# Altium PCB EEG_PCB.PcbDoc (part 2 of 2)
Units mm, origin at the board's own origin, x right, y up, seen from the top; angles counter-clockwise.
Board outline 100 x 50 mm, 4 copper layers (Top Layer, GND Layer, Power Layer, Bottom Layer), stack 0.568 mm thick; 118 components, 80 nets, 412 pads, 345 vias.
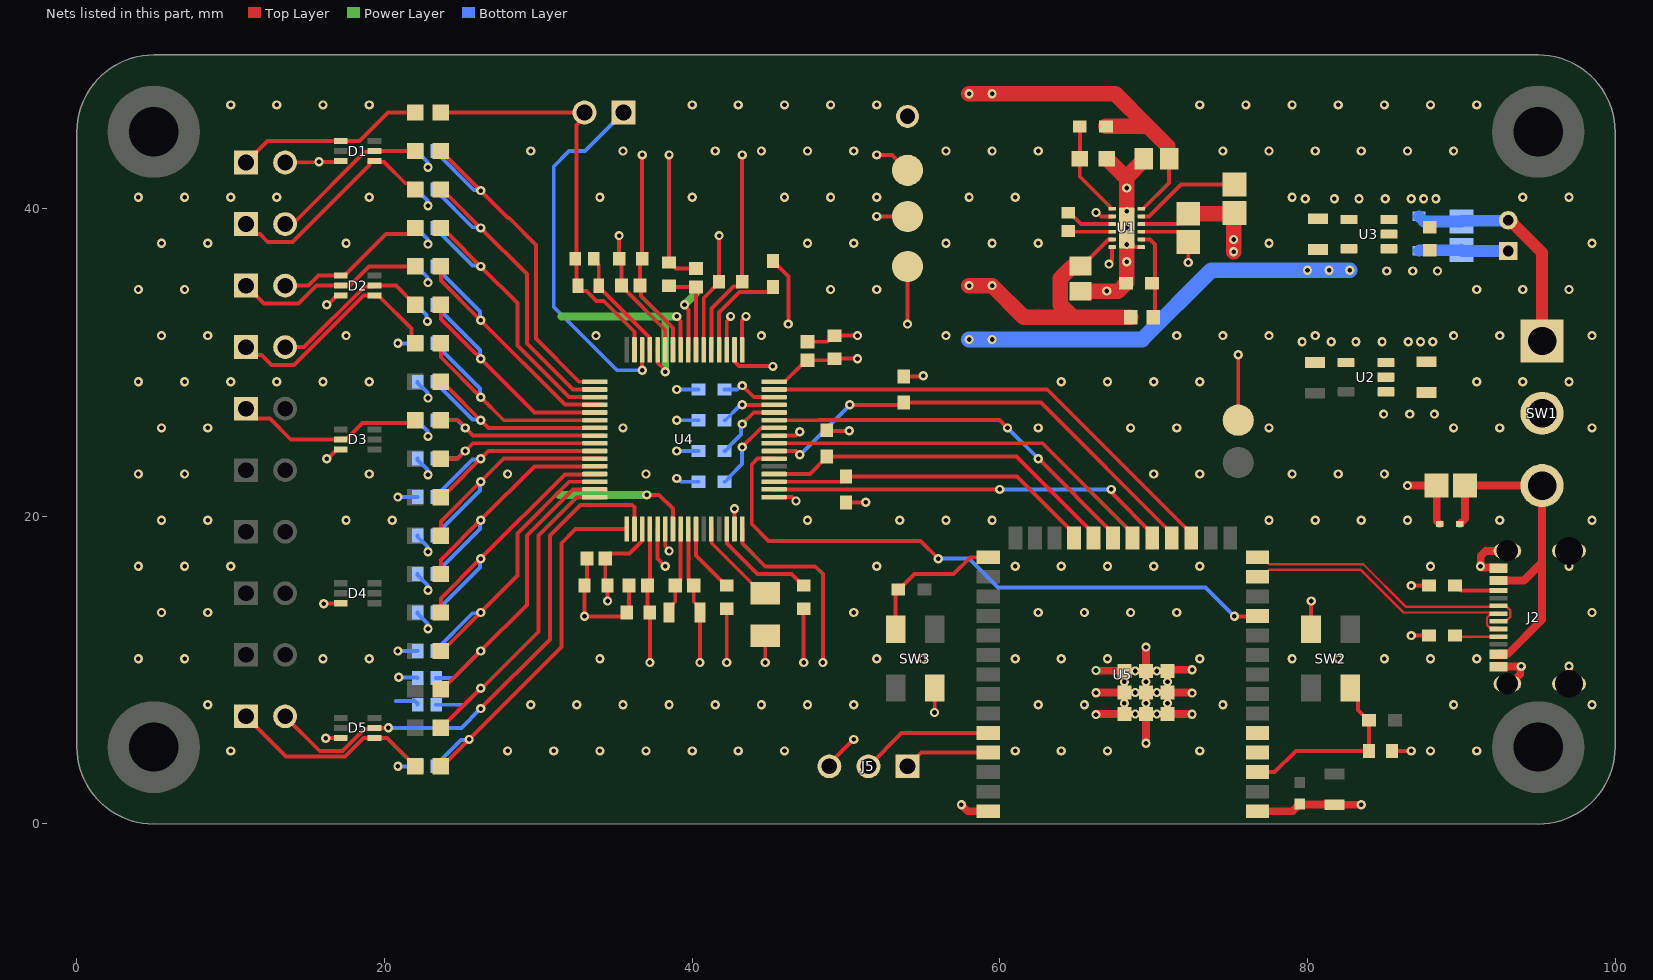
[diagram p4: the nets of this part, all layers, seen from the top]

## Via types
v1: diameter 0.6, hole 0.3, Top Layer to Bottom Layer, tented both sides, 345 vias

## Nets (pads, with @x,y where several pads share a name; then routed paths per layer and width w, separated by ;. In a path a pad name is that pad's centre, name@x,y a point inside that pad or via, vN(x,y) a via of type N, cw(c..) or ccw(c..) an arc to the next point about the centre after c; other vN are vias at no path point) (continued)
5P: D3.2 J3E.1 R18.1 | length 12.3
  Top Layer w0.254: J3E.1@11,27 11.648,26.352 12.553,26.352 13.905,25 D3.2@17.15,25 17.223,25.073 17.573,25.073 18.577,26.077 21.827,26.077 R18.1@22,26.25
6N: D2.5 J3D.2 R15.1 | length 10.6
  Top Layer w0.254: J3D.2@13.54,31 14.771,31 18.698,34.927 19.277,34.927 D2.5@19.35,35 20.749,35 R15.1@22,33.75
6P: D2.4 J3D.1 R16.1 | length 15
  Top Layer w0.254: J3D.1@11,31 11.507,30.493 12.007,30.493 12.656,29.844 14.116,29.844 18.622,34.35 D2.4@19.35,34.35 19.423,34.277 19.673,34.277 21.75,32.2 21.75,31.5 R16.1@22,31.25
7N: D2.1 J3C.2 R13.1 | length 10
  Top Layer w0.254: J3C.2@13.54,35 15.07,35 15.72,35.65 D2.1@17.15,35.65 17.4,35.65 17.473,35.723 20.096,38.346 21.596,38.346 R13.1@22,38.75
7P: D2.2 J3C.1 R14.1 | length 12.5
  Top Layer w0.254: J3C.1@11,35 12.156,33.844 14.415,33.844 15.571,35 D2.2@17.15,35 17.201,35.051 17.78,35.051 18.979,36.25 R14.1@22,36.25
8N: D1.5 J3B.2 R11.1 | length 10.4
  Top Layer w0.254: J3B.2@13.54,39 13.788,39.248 14.269,39.248 18.698,43.677 19.277,43.677 D1.5@19.35,43.75 R11.1@22,43.75
8P: D1.4 J3B.1 R12.1 | length 14.5
  Top Layer w0.254: J3B.1@11,39 11.648,38.352 11.898,38.352 12.406,37.844 14.019,37.844 19.027,42.852 19.027,43.027 19.1,43.1 D1.4@19.35,43.1 19.415,43.035 19.965,43.035 21.346,41.654 21.596,41.654 R12.1@22,41.25
ADS_GPIO1: R32.1 U4.42 | length 5.3
  Top Layer w0.254: v1(43.25,24.5) 44.477,25.727 45.302,25.727 U4.42@45.325,25.75
  Bottom Layer w0.254: R32.1@42.1,22.25 42.15,22.25 42.423,22.523 42.423,22.573 43.25,23.4 v1(43.25,24.5)
ADS_GPIO2: R33.1 U4.44 | length 4.6
  Top Layer w0.254: v1(43.25,26) 44,26.75 U4.44@45.325,26.75
  Bottom Layer w0.254: R33.1@42.1,24.25 42.15,24.25 42.423,24.523 42.423,24.573 43.184,25.334 43.184,25.934 v1(43.25,26)
ADS_GPIO3: R34.1 U4.45 | length 3.6
  Top Layer w0.254: v1(43.25,27.25) U4.45@45.325,27.25
  Bottom Layer w0.254: R34.1@42.1,26.25 42.15,26.25 43.084,27.184 43.184,27.184 v1(43.25,27.25)
ADS_GPIO4: R35.1 U4.46 | length 3.6
  Top Layer w0.254: v1(43.25,28.5) 44,27.75 U4.46@45.325,27.75
  Bottom Layer w0.254: R35.1@42.1,28.25 42.931,28.25 43.181,28.5 v1(43.25,28.5)
ADS_RESET: R30.1 U4.36 U5.22 | length 23.7
  Top Layer w0.254: U4.36@45.325,22.75 47.65,22.75 48.75,23.85 R30.1@48.75,23.9 61.085,23.9 66.095,18.89 U5.22@66.095,18.59
ADS_START: U4.38 U5.11 | length 40.9
  Top Layer w0.254: U4.38@45.325,23.75 44.25,23.75 43.873,23.373 43.873,19.49 44.96,18.403 54.847,18.403 v1(56,17.25) ; v1(75.25,13.5) 76.72,13.5 U5.11@76.75,13.53
  Bottom Layer w0.254: v1(56,17.25) 58,17.25 59.875,15.375 73.375,15.375 v1(75.25,13.5)
AVDD: C4.1 C39.1 C40.1 C41.2 C44.1 C45.2 R1.1 TP2.1 U1.11 U4.19 U4.21 U4.22 U4.54 U4.56 U4.59 | length 51.8
  Top Layer w0.254: C41.2@34.35,17.25 34.35,15.65 C40.1@34.5,15.5 v1(34.5,14.5) ; C41.2@34.35,17.275 34.648,17.573 35.915,17.573 36.727,18.385 36.727,19.152 U4.19@36.75,19.175 ; v1(35.25,38.25) C44.1@35.25,36.75 35.4,36.6 C45.2@35.4,35 ; C45.2@35.4,34.975 38.25,32.125 U4.59@38.25,30.825 ; U4.21@37.75,19.175 37.75,17.25 v1(38.25,16.75) ; U4.22@38.25,19.175 38.25,18.059 38.5,17.809 v1(38.5,17.75) ; v1(39.5,33.75) 39.5,33.656 39.75,33.406 U4.56@39.75,30.825 ; U4.54@40.75,30.825 40.75,34.2 41.75,35.2 C39.1@41.75,35.25 v1(41.75,38.25) ; v1(52,39.5) TP2.1@54,39.5 ; C4.1@65.25,36.276 65.351,36.276 67.073,37.998 67.298,37.998 U1.11@67.3,38
  Top Layer w1.016: v1(58,35) v1(59.5,35) 61.55,32.95 64.757,32.95 ; C4.1@65.25,36.276 65.155,36.181 64.641,36.181 63.938,35.478 63.938,33.769 64.757,32.95 ; R1.1@68.521,32.95 64.757,32.95
  Power Layer w0.508: v1(39.5,33.75) 40.25,34.5
AVSS: C5.2 C32.1 C33.2 C34.1 C35.2 C36.2 C37.1 C38.2 C39.2 C42.2 C43.1 C44.2 C45.1 R3.2 TP3.1 U1.6 U4.20 U4.23 U4.25 U4.32 U4.53 U4.57 U4.58 U4.60 | length 124.1
  Top Layer w0.254: v1(36.75,43.5) C44.2@36.75,36.75 36.6,36.6 C45.1@36.6,35 36.682,34.918 36.682,34.318 38.75,32.25 U4.58@38.75,30.825 ; v1(37.046,21.394) 37.856,21.394 38.75,20.5 U4.23@38.75,19.175 ; v1(37.25,10.5) C43.1@37.25,13.75 37.1,13.9 C42.2@37.1,15.5 37.25,15.65 U4.20@37.25,19.175 ; U4.60@37.75,30.825 37.773,30.802 37.773,29.977 38.184,29.566 38.184,29.466 v1(38.25,29.4) ; C36.2@38.5,36.5 v1(38.5,43.5) ; C36.2@38.55,36.5 38.95,36.1 C37.1@40.25,36.1 ; v1(39,33) 39,32.933 39.25,32.683 U4.57@39.25,30.825 ; U4.25@39.75,19.175 39.75,15.875 40.1,15.525 C32.1@40.1,15.5 40.1,14.45 40.5,14.05 C33.2@40.5,13.75 v1(40.5,10.5) ; U4.53@41.25,30.825 41.25,33.5 42.685,34.935 42.977,34.935 43.25,35.208 C39.2@43.25,35.25 v1(43.25,43.5) ; v1(42.25,10.5) C38.2@42.25,14 ; U4.32@43.25,19.175 43.273,19.152 43.273,18.227 44.75,16.75 48,16.75 48.5,16.25 v1(48.5,10.5) ; v1(44.75,10.5) C34.1@44.75,12.249 ; v1(47.25,10.5) C35.2@47.25,14 ; v1(52,43.5) 53,43.5 TP3.1@54,42.5 ; U1.6@69.2,40 69.321,40 71.002,41.681 C5.2@71.002,43.25
  Top Layer w1.016: v1(58,47.478) v1(59.5,47.478) 67.5,47.478 69.628,45.35 ; R3.2@66.9,45.35 69.628,45.35 ; C5.2@71.002,43.25 70.908,43.345 70.908,44.07 69.628,45.35
  Power Layer w0.254: 31.25,21.5 31.356,21.394
  Power Layer w0.508: 31.356,21.394 v1(37.046,21.394) ; 31.5,33 38.25,33 ; v1(38.25,29.4) 38.25,33 ; v1(39,33) 38.25,33
BIAS: D1.1 J3A.1 R10.1 | length 12.3
  Top Layer w0.254: J3A.1@11,43 12.4,44.4 D1.1@17.15,44.4 18.379,44.4 20.229,46.25 R10.1@22,46.25
BIAS_IN: JP1.1 U4.62 | length 23.9
  Top Layer w0.254: v1(36.75,29.5) U4.62@36.75,30.825
  Bottom Layer w0.254: JP1.1@35.54,46.25 33.04,43.75 32,43.75 31,42.75 31,33.613 35.113,29.5 v1(36.75,29.5)
BIAS_INV: C14.1 R9.1 U4.61 | length 7.3
  Top Layer w0.254: C14.1@33.6,36.75 33.6,36.675 33.925,36.35 R9.1@33.925,35 ; R9.1@33.925,34.875 34.148,34.652 34.19,34.652 37.227,31.615 37.227,30.848 U4.61@37.25,30.825
BIAS_OUT: C14.2 JP1.2 R9.2 R10.2 U4.63 | length 26.9
  Top Layer w0.254: R10.2@23.659,46.25 JP1.2@33,46.25 33,45.966 32.488,45.453 32.488,35.087 R9.2@32.575,35 ; R9.2@32.575,34.875 32.798,34.652 33.127,34.652 33.779,34 34.25,34 36.25,32 U4.63@36.25,30.825
CLKSEL: R29.1 U4.52 | length 6.6
  Top Layer w0.254: U4.52@41.75,30.825 41.75,33.25 43.073,34.573 43.744,34.573 43.748,34.577 44.977,34.577 45.25,34.85 R29.1@45.25,34.9
CS: R28.1 U4.39 U5.18 | length 31.2
  Top Layer w0.254: U4.39@45.325,24.25 46.75,24.25 v1(47,24) ; v1(50.25,27.25) 53.6,27.25 R28.1@53.75,27.4 62.665,27.4 71.175,18.89 U5.18@71.175,18.59
  Bottom Layer w0.254: v1(47,24) v1(50.25,27.25)
DRDY: U4.47 U5.17 | length 31.3
  Top Layer w0.254: U4.47@45.325,28.25 63.085,28.25 72.445,18.89 U5.17@72.445,18.59
DVDD: C9.1 C46.1 C47.2 R28.2 R29.2 R30.2 R31.2 TP4.1 U3.5 U4.48 U4.50 | length 48.4
  Top Layer w0.254: U4.50@42.75,30.825 42.773,30.802 42.773,30.035 43.035,29.773 45.227,29.773 v1(45.25,29.75) ; R29.2@45.25,36.6 46.25,35.6 v1(46.25,32.5) ; U4.48@45.325,28.75 46,28.75 47.102,29.852 47.202,29.852 C47.2@47.5,30.15 49.15,30.15 C46.1@49.25,30.25 v1(50.75,30.25) ; R30.2@48.75,25.6 48.791,25.559 v1(50.211,25.559) ; R31.2@50,20.9 50.013,20.913 v1(51.288,20.913) ; R28.2@53.75,29.1 54.988,29.1 v1(55.026,29.138) ; v1(54,32.5) TP4.1@54,36.25
  Bottom Layer w1.016: v1(58,31.5) v1(59.5,31.5) 69.25,31.5 73.75,36 v1(80,36) 80.006,35.994 v1(81.405,35.994) 81.411,36 v1(82.75,36)
EN: C11.1 R7.2 SW2.1_1- U5.3 | length 12.5
  Top Layer w0.254: U5.3@76.75,3.37 77.87,3.37 79.25,4.75 C11.1@84,4.75 R7.2@84,6.75 83.95,6.75 83.278,7.422 83.278,8.337 SW2.1_1-@82.77,8.845
GND: C2.2 C3.2 C4.2 C5.1 C6.2 C7.2 C9.2 C10.2 C11.2 C12.2 C13.2 C15.2 C16.2 C17.2 C18.2 C19.2 C20.2 C21.2 C22.2 C23.2 C24.2 C25.2 C26.2 C27.2 C28.2 C29.2 C30.2 C31.2 C40.2 C41.1 C42.1 C43.2 C46.2 C47.1 C48.2 C49.2 D1.3 D2.3 D3.3 D4.3 D5.3 D6.2 D7.2 J1.1 J2.1 J2.2 J2.3 J2.4 J2.A1-B12 J2.B1-A12 J3A.2 J5.3 R2.2 R4.1 R5.2 R6.2 R32.2 R33.2 R34.2 R35.2 SW2.2_2+ SW3.2_2+ TP1.1 U1.1 U1.4 U1.13 U2.2 U2.4 U3.2 U3.4 U4.31 U4.33 U4.41 U4.49 U4.51 U5.1 U5.40 U5.41_1 U5.41_2 U5.41_3 U5.41_4 U5.41_5 U5.41_6 U5.41_7 U5.41_8 U5.41_9 U5.41_10 U5.41_11 U5.41_12 U5.41_13 U5.41_14 U5.41_15 U5.41_16 U5.41_17 U5.41_18 U5.41_19 U5.41_20 U5.41_21 | length 138.8
  Top Layer w0.254: J3A.2@13.54,43 13.563,43.023 15.719,43.023 v1(15.742,43.046) 16.827,43.046 16.881,43.1 D1.3@17.15,43.1 ; v1(16.046,14.318) 16.062,14.334 17.134,14.334 D4.3@17.15,14.35 ; v1(16.179,5.578) 16.19,5.589 17.139,5.589 D5.3@17.15,5.6 ; v1(16.239,23.738) 16.288,23.738 16.9,24.35 D3.3@17.15,24.35 ; v1(16.25,33.75) 16.3,33.75 16.9,34.35 D2.3@17.15,34.35 ; C41.1@33.15,17.25 33.15,15.65 C40.2@33,15.5 v1(33,13.5) 35.5,13.5 C43.2@35.75,13.75 35.9,13.9 C42.1@35.9,15.5 ; U4.51@42.25,30.825 42.25,32.683 42.5,32.933 v1(42.5,33) ; U4.31@42.75,19.175 v1(42.75,20.5) ; U4.49@43.25,30.825 43.25,32.75 v1(43.5,33) ; U4.33@45.325,21.25 46.5,21.25 v1(46.75,21) ; U4.41@45.325,25.25 46.75,25.25 v1(47,25.5) ; C47.1@47.5,31.35 48.8,31.35 49.2,31.75 C46.2@49.25,31.75 v1(50.75,31.75) ; J5.3@48.92,3.75 48.92,3.92 v1(50.5,5.5) ; v1(55.75,7.25) 55.77,7.27 SW3.2_2+@55.77,8.845 ; U5.41_12@68.1,7.85 U5.41_3@68.1,8.55 U5.41_15@68.1,9.25 ; v1(68.25,37.675) 68.5,37.675 68.673,37.502 69.198,37.502 U1.1@69.2,37.5 ; U5.41_17@68.8,7.15 U5.41_8@69.5,7.15 U5.41_16@70.2,7.15 ; U5.41_19@68.8,8.55 U5.41_1@69.5,8.55 ; U5.41_21@68.8,9.95 U5.41_5@69.5,9.95 U5.41_20@70.2,9.95 ; U1.4@69.2,39 71.573,39 C2.2@72.25,39.675 C2.2@72.25,39.675 ; U5.41_14@69.5,9.25 U5.41_1@69.5,8.55 ; U5.41_18@70.2,8.55 U5.41_1@69.5,8.55 ; U5.41_11@70.9,7.85 U5.41_2@70.9,8.55 U5.41_13@70.9,9.25 ; SW2.2_2+@80.23,12.655 80.23,14.48 v1(80.25,14.5) ; C11.2@85.5,4.75 v1(86.75,4.75) ; v1(86.75,12.25) R5.2@87.9,12.25 ; v1(86.75,15.5) R6.2@87.9,15.5
  Top Layer w0.508: v1(57.5,1.25) 57.92,0.83 U5.40@59.25,0.83 ; v1@66.243,9.98 66.258,9.965 68.085,9.965 U5.41_6@68.1,9.95 ; v1@66.27,8.532 66.279,8.541 68.091,8.541 U5.41_3@68.1,8.55 ; v1@66.276,7.11 66.301,7.11 66.341,7.15 U5.41_9@68.1,7.15 ; v1(69.5,5.25) U5.41_8@69.5,7.15 ; U5.41_10@69.5,7.85 U5.41_1@69.5,8.55 ; U5.41_5@69.5,9.95 v1(69.5,11.5) ; U5.41_7@70.9,7.15 70.906,7.144 72.493,7.144 v1(72.5,7.137) ; U5.41_2@70.9,8.55 72.466,8.55 72.505,8.512 v1@72.53,8.512 ; U5.41_4@70.9,9.95 70.978,10.028 v1(72.5,10.028) v1@72.552,10.028 ; U5.1@76.75,0.83 79.03,0.83 C13.2@79.5,1.3 79.525,1.275 81.725,1.275 C12.2@81.75,1.25 v1(83.5,1.25) ; v1(86.5,22) C48.2@88.399,22 88.399,19.691 D7.2@88.59,19.5 ; J2.A1-B12@92.425,10.23 92.433,10.238 v1@93.886,10.238 ; J2.B1-A12@92.425,16.63 92.379,16.676 91.349,16.676 91.292,16.732 91.268,16.732 v1(91.25,16.75) 91.268,16.768 91.268,17.428 91.59,17.75 J2.2@93,17.75 ; J2.1@93,9.11 93.198,9.11 93.828,9.74 93.828,10.18 v1@93.886,10.238 ; v1(93.894,10.246) v1@93.886,10.238 ; J2.3@97,9.11 v1(97,10.25) ; v1(97,16.75) 97,17.523 97.227,17.75 J2.4@97.25,17.75
  Top Layer w1.016: C4.2@65.25,34.624 66.95,34.624 67.674,34.624 R2.2@68.2,35.15 68.25,35.2 v1(68.25,36.55) v1(68.25,37.675) ; R4.1@66.95,43.25 66.969,43.25 68.25,41.969 ; v1(68.25,39.825) v1(68.25,41.35) 68.25,41.969 ; C5.1@69.35,43.25 69.35,43.149 68.25,42.049 68.25,41.969 ; C2.2@72.25,39.675 C3.2@75.201,39.675 ; v1(75.2,37.2) v1(75.2,38) C3.2@75.2,39.675 ; C3.2@75.275,39.75 C3.2@75.25,39.725 C3.2@75.201,39.675
  Bottom Layer w0.254: 20.75,8 21.902,8 21.902,8.073 22.15,7.825 C15.2@22.15,7.75 ; v1(20.868,3.75) C31.2@22.15,3.75 ; v1(20.868,11.25) C29.2@22.15,11.25 ; v1(20.868,21.25) C25.2@22.15,21.25 ; v1(20.868,31.25) C21.2@22.15,31.25 ; v1(20.925,9.535) 22.115,9.535 C30.2@22.15,9.5 ; C28.2@22.15,13.75 22.15,13.675 22.782,13.043 22.782,12.745 v1(22.829,12.698) ; C27.2@22.15,16.25 22.15,16.175 22.782,15.543 22.782,15.245 v1(22.829,15.198) ; C26.2@22.15,18.75 22.15,18.675 22.782,18.043 22.782,17.745 v1(22.829,17.698) ; C24.2@22.15,23.75 22.15,23.675 22.782,23.043 22.782,22.745 v1(22.829,22.698) ; C23.2@22.15,26.25 22.15,26.175 22.782,25.543 22.782,25.245 v1(22.829,25.198) ; C22.2@22.15,28.75 22.15,28.675 22.782,28.043 22.782,27.745 v1(22.829,27.698) ; C20.2@22.15,33.75 22.15,33.675 22.738,33.087 22.738,32.722 v1(22.785,32.675) ; C19.2@22.15,36.25 22.15,36.175 22.782,35.543 22.782,35.245 v1(22.829,35.198) ; C18.2@22.15,38.75 22.15,38.675 22.782,38.043 22.782,37.745 v1(22.829,37.698) ; C17.2@22.15,41.25 22.15,41.175 22.782,40.543 22.782,40.245 v1(22.829,40.198) ; C16.2@22.15,43.75 22.15,43.675 22.782,43.043 22.782,42.745 v1(22.829,42.698) ; v1(39,22.466) 39.067,22.466 39.283,22.25 R32.2@40.4,22.25 ; v1(39,24.25) R33.2@40.4,24.25 ; v1(39,26.25) R34.2@40.4,26.25 ; v1(39,28.25) R35.2@40.4,28.25
  Bottom Layer w0.762: D6.2@87.25,37.27 87.277,37.297 89.973,37.297 C49.2@90,37.325 ; C49.2@90.075,37.25 J1.1@93.05,37.25
  other v1: 10,4.75 28,4.75 31,4.75 34,4.75 37,4.75 40,4.75 43,4.75 46,4.75 61,4.75 64,4.75 67,4.75 73,4.75 88,4.75 91,4.75 66.25,7.11 8.5,7.75 29.5,7.75 32.5,7.75 35.5,7.75 38.5,7.75 41.5,7.75 44.5,7.75 47.5,7.75 50.5,7.75 62.5,7.75 65.5,7.75 74.5,7.75 89.5,7.75 98.5,7.75 72.5,8.512 66.25,8.532 66.25,9.98 4,10.75 7,10.75 16,10.75 19,10.75 34,10.75 52,10.75 55,10.75 61,10.75 64,10.75 67,10.75 73,10.75 79,10.75 82,10.75 85,10.75 88,10.75 91,10.75 5.5,13.75 8.5,13.75 50.5,13.75 62.5,13.75 65.5,13.75 68.5,13.75 71.5,13.75 98.5,13.75 4,16.75 7,16.75 10,16.75 52,16.75 61,16.75 64,16.75 67,16.75 70,16.75 73,16.75 88,16.75 5.5,19.75 8.5,19.75 17.5,19.75 20.5,19.75 47.5,19.75 53.5,19.75 56.5,19.75 59.5,19.75 77.5,19.75 80.5,19.75 83.5,19.75 86.5,19.75 92.5,19.75 98.5,19.75 4,22.75 7,22.75 19,22.75 28,22.75 37,22.75 70,22.75 73,22.75 79,22.75 82,22.75 85,22.75 5.5,25.75 8.5,25.75 35.5,25.75 62.5,25.75 68.5,25.75 71.5,25.75 77.5,25.75 89.5,25.75 92.5,25.75 98.5,25.75 4,28.75 7,28.75 10,28.75 13,28.75 16,28.75 19,28.75 64,28.75 67,28.75 70,28.75 73,28.75 91,28.75 94,28.75 97,28.75 79.65,31.35 81.55,31.35 83.15,31.35 86.55,31.35 87.35,31.35 88.15,31.35 5.5,31.75 8.5,31.75 17.5,31.75 33.75,31.75 44.5,31.75 56.5,31.75 71.5,31.75 74.5,31.75 77.5,31.75 80.5,31.75 89.5,31.75 92.5,31.75 98.5,31.75 66.95,34.65 4,34.75 7,34.75 49,34.75 52,34.75 91,34.75 94,34.75 97,34.75 5.5,37.75 8.5,37.75 17.5,37.75 47.5,37.75 50.5,37.75 56.5,37.75 59.5,37.75 62.5,37.75 77.5,37.75 98.5,37.75 68.25,38.75 79.85,40.65 81.75,40.65 83.35,40.65 86.75,40.65 87.55,40.65 88.35,40.65 4,40.75 7,40.75 10,40.75 13,40.75 19,40.75 34,40.75 40,40.75 46,40.75 49,40.75 52,40.75 58,40.75 61,40.75 79,40.75 94,40.75 97,40.75 29.5,43.75 35.5,43.75 41.5,43.75 44.5,43.75 47.5,43.75 50.5,43.75 56.5,43.75 59.5,43.75 62.5,43.75 74.5,43.75 77.5,43.75 80.5,43.75 83.5,43.75 86.5,43.75 89.5,43.75 10,46.75 13,46.75 16,46.75 19,46.75 40,46.75 43,46.75 46,46.75 49,46.75 52,46.75 73,46.75 76,46.75 79,46.75 82,46.75 85,46.75 88,46.75 91,46.75
GPIO0: R8.2 SW3.1_1- U5.27 | length 9.4
  Top Layer w0.254: SW3.1_1-@53.23,12.655 53.23,15.104 53.376,15.25 R8.2@53.4,15.25 53.45,15.25 54.45,16.25 57,16.25 58.09,17.34 U5.27@59.25,17.34
GPIO4: U5.4
GPIO5: U5.5
IN1N: C30.1 R25.2 U4.15 | length 22.2
  Top Layer w0.254: R25.2@23.659,8.75 24.064,9.155 24.155,9.155 v1(26.25,11.25) 29.25,14.25 29.25,18.75 32.25,21.75 U4.15@34.175,21.75
  Bottom Layer w0.254: C30.1@23.35,9.5 24.5,9.5 v1(26.25,11.25)
IN1P: C15.1 R26.2 U4.16 | length 23.7
  Top Layer w0.254: R26.2@23.658,6.25 26.227,8.818 26.318,8.818 30,12.5 30,18.75 32.477,21.227 34.152,21.227 U4.16@34.175,21.25
  Bottom Layer w0.254: C15.1@23.35,7.75 25.188,7.75 v1(26.256,8.818)
IN2N: C28.1 R23.2 U4.13 | length 19.5
  Top Layer w0.254: R23.2@23.659,13.75 23.659,14.659 v1(26.25,17.25) 31.727,22.727 34.152,22.727 U4.13@34.175,22.75
  Bottom Layer w0.254: C28.1@23.35,13.75 23.35,13.825 26.203,16.678 26.203,17.203 v1(26.25,17.25)
IN2P: C29.1 R24.2 U4.14 | length 20.7
  Top Layer w0.254: R24.2@23.659,11.25 24.064,11.655 24.155,11.655 v1(26.25,13.75) 28.642,16.142 28.642,18.892 32,22.25 U4.14@34.175,22.25
  Bottom Layer w0.254: C29.1@23.35,11.25 23.35,11.325 25.728,13.703 26.203,13.703 v1(26.25,13.75)
IN3N: C26.1 R21.2 U4.11 | length 17.8
  Top Layer w0.254: R21.2@23.659,18.75 23.659,19.659 v1(26.25,22.25) 27.75,23.75 U4.11@34.175,23.75
  Bottom Layer w0.254: C26.1@23.35,18.75 23.35,18.825 26.203,21.678 26.203,22.203 v1(26.25,22.25)
IN3P: C27.1 R22.2 U4.12 | length 18.6
  Top Layer w0.254: R22.2@23.659,16.25 23.659,17.159 v1(26.25,19.75) 29.75,23.25 U4.12@34.175,23.25
  Bottom Layer w0.254: C27.1@23.35,16.25 23.35,16.325 26.203,19.178 26.203,19.703 v1(26.25,19.75)
IN4N: C24.1 R19.2 U4.9 | length 13
  Top Layer w0.254: R19.2@23.659,23.75 24.75,23.75 25.75,24.75 U4.9@34.175,24.75
  Bottom Layer w0.254: C24.1@23.35,23.75 24.75,23.75 v1(25.25,24.25)
IN4P: C25.1 R20.2 U4.10 | length 15.7
  Top Layer w0.254: R20.2@23.659,21.25 24.064,21.655 24.155,21.655 v1(26.25,23.75) 26.75,24.25 U4.10@34.175,24.25
  Bottom Layer w0.254: C25.1@23.35,21.25 23.35,21.325 25.728,23.703 26.203,23.703 v1(26.25,23.75)
IN5N: C22.1 R17.2 U4.7 | length 15.7
  Top Layer w0.254: R17.2@23.659,28.75 24.064,28.345 24.155,28.345 v1(26.25,26.25) 26.75,25.75 U4.7@34.175,25.75
  Bottom Layer w0.254: C22.1@23.35,28.75 23.35,28.675 25.728,26.297 26.203,26.297 v1(26.25,26.25)
IN5P: C23.1 R18.2 U4.8 | length 13.1
  Top Layer w0.254: R18.2@23.659,26.25 24.823,26.25 25.25,25.823 v1(25.25,25.75) 25.75,25.25 U4.8@34.175,25.25
  Bottom Layer w0.254: C23.1@23.35,26.25 24.75,26.25 v1(25.25,25.75)
IN6N: C20.1 R15.2 U4.5 | length 18.6
  Top Layer w0.254: R15.2@23.659,33.75 23.659,32.841 v1(26.25,30.25) 29.75,26.75 U4.5@34.175,26.75
  Bottom Layer w0.254: C20.1@23.35,33.75 23.35,33.675 26.203,30.822 26.203,30.297 v1(26.25,30.25)
IN6P: C21.1 R16.2 U4.6 | length 17.8
  Top Layer w0.254: R16.2@23.659,31.25 23.659,30.341 v1(26.25,27.75) 27.75,26.25 U4.6@34.175,26.25
  Bottom Layer w0.254: C21.1@23.35,31.25 23.35,31.175 26.203,28.322 26.203,27.797 v1(26.25,27.75)
IN7N: C18.1 R13.2 U4.3 | length 20.7
  Top Layer w0.254: R13.2@23.659,38.75 24.064,38.345 24.155,38.345 v1(26.25,36.25) 28.642,33.858 28.642,31.108 32,27.75 U4.3@34.175,27.75
  Bottom Layer w0.254: C18.1@23.35,38.75 23.35,38.675 25.728,36.297 26.203,36.297 v1(26.25,36.25)
IN7P: C19.1 R14.2 U4.4 | length 19.5
  Top Layer w0.254: R14.2@23.659,36.25 23.659,35.341 v1(26.25,32.75) 31.727,27.273 34.152,27.273 U4.4@34.175,27.25
  Bottom Layer w0.254: C19.1@23.35,36.25 23.35,36.175 26.203,33.322 26.203,32.797 v1(26.25,32.75)
IN8N: C16.1 R11.2 U4.1 | length 24.3
  Top Layer w0.254: R11.2@23.659,43.75 26.233,41.177 v1(26.252,41.177) 28.037,39.392 28.108,39.392 29.846,37.654 29.846,31.553 32.649,28.75 U4.1@34.175,28.75
  Bottom Layer w0.254: C16.1@23.35,43.75 23.35,43.675 25.801,41.224 26.205,41.224 v1(26.252,41.177)
IN8P: C17.1 R12.2 U4.2 | length 22.5
  Top Layer w0.254: R12.2@23.659,41.25 24.064,40.845 24.155,40.845 v1(26.25,38.75) 29.25,35.75 29.25,31.25 32.25,28.25 U4.2@34.175,28.25
  Bottom Layer w0.254: C17.1@23.35,41.25 23.35,41.175 25.728,38.797 26.203,38.797 v1(26.25,38.75)
MISO: U4.43 U5.21 | length 25.4
  Top Layer w0.254: U4.43@45.325,26.25 48.229,26.25 48.256,26.277 59.973,26.277 v1(60.5,25.75) ; v1(62.5,23.75) 62.505,23.75 67.365,18.89 U5.21@67.365,18.59
  Bottom Layer w0.254: v1(60.5,25.75) v1(62.5,23.75)
MOSI: U4.34 U5.19 | length 26.2
  Top Layer w0.254: U4.34@45.325,21.75 v1(60,21.75) ; v1(67.25,21.75) 67.316,21.684 67.316,21.479 69.905,18.89 U5.19@69.905,18.59
  Bottom Layer w0.254: v1(60,21.75) v1(67.25,21.75)
NetC1_1: C1.1 U1.10 | length 2.9
  Top Layer w0.254: C1.1@64.45,38.55 64.498,38.502 67.298,38.502 U1.10@67.3,38.5
NetC1_2: C1.2 U1.9 | length 3.2
  Top Layer w0.254: C1.2@64.45,39.75 64.525,39.75 65.275,39 U1.9@67.3,39
NetC3_1: C3.1 U1.5 | length 6.4
  Top Layer w0.254: U1.5@69.2,39.5 69.699,39.5 71.774,41.575 C3.1@74.75,41.575
NetJ2_A5: J2.A5 R5.1 | length 2.9
  Top Layer w0.158: R5.1@89.6,12.25 89.67,12.18 J2.A5@92.425,12.18
NetJ2_B5: J2.B5 R6.1 | length 3
  Top Layer w0.254: R6.1@89.6,15.5 89.65,15.5 89.97,15.18 J2.B5@92.425,15.18
NetR1_2: R1.2 R2.1 U1.2 | length 5.8
  Top Layer w0.254: U1.2@69.2,38 69.765,38 70.1,37.665 70.1,35.15 70.1,33.071 R1.2@69.979,32.95
NetR3_1: R3.1 R4.2 U1.7 | length 6.3
  Top Layer w0.254: R3.1@65.2,45.35 65.2,43.253 R4.2@65.197,43.25 65.197,42.103 67.177,40.123 67.177,40.002 67.179,40 U1.7@67.3,40
PWDN: R31.1 U4.35 U5.23 | length 21.5
  Top Layer w0.254: U4.35@45.325,22.25 49.7,22.25 50,22.55 R31.1@50,22.6 61.115,22.6 64.825,18.89 U5.23@64.825,18.59
REF: D5.4 J3J.1 R27.1 | length 13.3
  Top Layer w0.254: J3J.1@11,7 13.604,4.396 17.418,4.396 18.622,5.6 20.15,5.6 R27.1@21.595,4.155 ; R27.1@21.595,4.154 R27.1@22,3.75
RXD: J5.2 U5.36 | length 8.7
  Top Layer w0.254: J5.2@51.46,3.75 53.62,5.91 U5.36@59.25,5.91
SCLK: U4.40 U5.20 | length 26
  Top Layer w0.254: U4.40@45.325,24.75 62.775,24.75 68.635,18.89 U5.20@68.635,18.59
SRB1: C31.1 R27.2 U4.17 | length 25.4
  Top Layer w0.254: R27.2@23.659,3.75 24.064,4.155 24.155,4.155 v1(25.5,5.5) 31.5,11.5 31.5,18.25 32.425,19.175 U4.17@35.75,19.175
  Bottom Layer w0.254: C31.1@23.35,3.75 23.35,3.825 24.978,5.453 25.453,5.453 v1(25.5,5.5)
SRB2: D5.5 J3J.2 U4.18 | length 35.7
  Top Layer w0.254: J3J.2@13.54,7 15.79,4.75 17.271,4.75 18.698,6.177 19.277,6.177 D5.5@19.35,6.25 v1(20.25,6.25) ; v1(26.25,7.5) 30.75,12 30.75,18.75 32.75,20.75 36.101,20.75 36.25,20.601 U4.18@36.25,19.175
  Bottom Layer w0.254: v1(20.25,6.25) 25,6.25 v1(26.25,7.5)
TXD: J5.1 U5.37 | length 5.6
  Top Layer w0.254: J5.1@54,3.75 54.89,4.64 U5.37@59.25,4.64
USB_D_N: J2.A7 J2.B7 U5.13 | length 19.4
  Top Layer w0.158: U5.13@76.75,16.07 76.75,16.432 77.412,16.432 77.504,16.524 83.476,16.524 86.25,13.75 92,13.75 92.355,13.75 J2.A7@92.425,13.68 92.355,13.68 J2.A7@92,13.68 ; J2.A7@91.973,13.68 91.973,13.653 91.929,13.609 91.871,13.609 91.671,13.409 91.671,12.939 91.859,12.751 92.354,12.751 J2.B7@92.425,12.68
USB_D_P: J2.A6 J2.B6 U5.14 | length 19.4
  Top Layer w0.158: U5.14@76.75,17.34 76.75,16.978 77.412,16.978 77.504,16.886 83.625,16.886 86.4,14.111 92.425,14.111 92.972,14.111 93.194,13.889 93.194,13.471 92.974,13.251 92.496,13.251 J2.A6@92.425,13.18
VBAT: C49.1 D6.1 J1.2 SW1.1 | length 14.8
  Top Layer w0.762: J1.2@93.05,39.25 93.148,39.25 95.25,37.148 SW1.1@95.25,31.4
  Bottom Layer w0.762: D6.1@87.25,39.5 87.575,39.175 C49.1@90,39.175 90.037,39.213 93.013,39.213 J1.2@93.05,39.25
VBUS: C48.1 D7.1 J2.A4-B9 J2.B4-A9 SW1.3 | length 23.4
  Top Layer w0.508: D7.1@89.91,19.5 90.25,19.84 C48.1@90.25,22 SW1.3@95.25,22 95.25,17 ; J2.A4-B9@92.425,11.03 92.471,11.076 93.047,11.076 95.25,13.279 95.25,17 ; J2.B4-A9@92.425,15.83 94.08,15.83 95.25,17
VCAP1: C34.2 U4.28 | length 5.8
  Top Layer w0.254: U4.28@41.25,19.175 41.273,19.152 41.273,18.252 44.525,15 C34.2@44.75,15
VCAP2: C35.1 U4.30 | length 7.1
  Top Layer w0.254: U4.30@42.25,19.175 42.273,19.152 42.273,18.227 44.25,16.25 46.45,16.25 47.2,15.5 C35.1@47.25,15.5
VCAP3: C36.1 C37.2 U4.55 | length 5.9
  Top Layer w0.254: C36.1@38.5,35 38.6,34.9 C37.2@40.25,34.9 U4.55@40.25,30.825
VCAP4: C38.1 U4.26 | length 4.5
  Top Layer w0.254: U4.26@40.25,19.175 40.25,17.45 42.2,15.5 C38.1@42.25,15.5
VIN: C2.1 C6.1 C10.1 SW1.2 TP6.1 U1.3 U1.8 U1.12 U2.1 U2.3 U3.1 U3.3 | length 11.2
  Top Layer w0.254: v1(66.25,39.75) 66.344,39.75 66.594,39.5 U1.8@67.3,39.5 ; v1(67.1,36.4) 67.1,36.467 67.3,36.667 U1.12@67.3,37.5 ; U1.3@69.2,38.5 71.573,38.5 C2.1@72.25,37.825 C2.1@72.25,37.825 v1(72.25,36.5) ; TP6.1@75.5,26.25 v1(75.5,30.5)
  other v1: 84.95,26.65 86.65,26.65 88.25,26.65 84.85,31.35 85.15,35.95 86.85,35.95 88.45,35.95 85.05,40.65
VREFP: C32.2 C33.1 U4.24 | length 5.7
  Top Layer w0.254: C33.1@38.5,13.75 38.5,14.05 38.9,14.45 C32.2@38.9,15.5 ; C32.2@38.9,15.525 39.25,15.875 U4.24@39.25,19.175
pads on no net: D1.2 D1.6 D2.6 D3.6 D4.6 D5.6 J2.A8 J2.B8 SW2.1_2+ SW2.2_1- SW3.1_2+ SW3.2_1- U4.27 U4.29 U4.37 U4.64 U5.6 U5.7 U5.8 U5.9 U5.10 U5.12 U5.15 U5.16 U5.24 U5.25 U5.26 U5.28 U5.29 U5.30 U5.31 U5.32 U5.33 U5.34 U5.35 U5.38 U5.39

## Polygon pours and split planes (outlines as drawn)
AVSS on Power Layer "Power Layer-AVSS" (solid, pour order 26): 27.5,0 53.25,0 53.25,11.25 32,11.25 32,19.25 39,19.25 39,33 32,33 32,42.75 60.25,42.75 60.25,50 27.5,50
AVDD on Power Layer "AVDD POLY" (solid, pour order 20): 33,12.25 53.25,12.25 53.25,18.25 43.5,18.25 43.5,34.25 60.25,34.25 60.25,41.75 33,41.75 33,34.25 40,34.25 40,18.25 33,18.25
GND on Power Layer "GND_L03_P022" (solid, pour order 22): 26.5,50 26.5,0 0,0 0,50
VIN on Power Layer "VIN POLY" (solid, pour order 7): 100,20 84.25,20 84.25,29.5 61.25,29.5 61.25,50 100,50
DVDD on Power Layer "DVDD POLY" (solid, pour order 21): 60.25,33.25 60.25,28.5 72.75,28.5 72.75,19.25 44.5,19.25 44.5,33.25
3v3 on Power Layer "3v3 POLY" (solid, pour order 11): 54.25,0 100,0 100,18.75 83.25,18.75 83.25,28.5 73.75,28.5 73.75,18.25 54.25,18.25
GND on GND Layer "GND_L02_P001" (solid, pour order 1): -5.75,55.25 -5.75,-6 -6,-6.25 105.25,-6.25 105.25,55.75 105,56
GND on Bottom Layer "BOT GND POLY" (solid, remove dead copper, pour order 24): -1.25,0 101.5,0 101.5,51.75 -1.25,51.75
GND on Top Layer "TOP GND POLY" (solid, remove dead copper, pour order 23): -2.5,51.5 102.25,51.5 102.25,0 -2.25,0

## Other copper
Top Layer:
  region net GND: 67.396,10.654 71.604,10.654 71.604,6.446 67.396,6.446
  region net GND: 83.95,38.05 88.95,38.05 88.95,41.05 86.25,41.05 86.25,38.65 83.95,38.65
  region net GND: 83.95,38.05 79.35,38.05 79.35,41.05 83.95,41.05
  region net GND: 83.75,28.75 88.75,28.75 88.75,31.75 86.05,31.75 86.05,29.35 83.75,29.35
  region net GND: 83.75,28.75 79.15,28.75 79.15,31.75 83.75,31.75
  region net VIN: 85.85,38.95 84.25,38.95 84.25,41.05 85.85,41.05
  region net VIN: 84.65,37.75 89,37.75 89,35.55 84.65,35.55
  region net VIN: 84.45,28.45 88.8,28.45 88.8,26.25 84.45,26.25
  region net VIN: 85.65,29.65 84.05,29.65 84.05,31.75 85.65,31.75
  region net 3v3: 83.25,28.45 79.15,28.45 79.15,26.25 83.25,26.25
  region net DVDD: 83.45,37.75 79.35,37.75 79.35,35.55 83.45,35.55

## Silkscreen, mask and mechanical layers (free items; w line width, h text height)
Top Overlay:
  text "BIAS GND" at 8.45,45.95 h1
  text "BOUT-BIN" at 37.7,45.7 h1
  text "GND" at 55.95,45.7 h1
  text "AVSS" at 55.7,41.95 h1
  text "+" at 98.004,41.75 h1.52
  text "+" at 90.004,39.75 h1.52
  text "AVDD" at 55.7,39.2 h1
  text "8+ 8-" at 3.2,38.45 h1
  text "DVDD" at 55.7,35.7 h1
  text "-" at 90.004,34.992 h1.52
  text "7+ 7-" at 3.2,34.45 h1
  text "-" at 98.004,33.492 h1.52
  text "6+ 6-" at 3.2,30.45 h1
  text "5+ 5-" at 3.2,26.45 h1
  text "VIN" at 77.45,25.7 h1
  text "3v3" at 77.45,22.95 h1
  text "4+ 4-" at 3.2,22.45 h1
  text "3+ 3-" at 3.2,18.45 h1
  text "2+ 2-" at 3.2,14.45 h1
  text "1+ 1-" at 3.2,10.45 h1
  text "REF SRB2" at 8.45,3.45 h1
  text "GND-RX-TX" at 37.95,3.2 h1
Bottom Overlay:
  text "Xavier / Asghar" at 89.75,22 h7
  text "University of Bath" at 89.75,16.528 h3
  text "EEG Module" at 89.75,12.25 h3
Mechanical 1:
  lines w0.254: 0,5 ccw(c5,5) 5,0 ; 0,45 cw(c5,45) 5,50 ; 95,0 ccw(c95,5) 100,5 ; 95,50 cw(c95,45) 100,45

## Text inside footprints (layer, text, board x,y; h text height)
U5: Top 3D Body "ANTENNA" at 72.5,-3.41 h1 r180